# EAGLE board MD9600 Head (EAGLE 7.7.0)
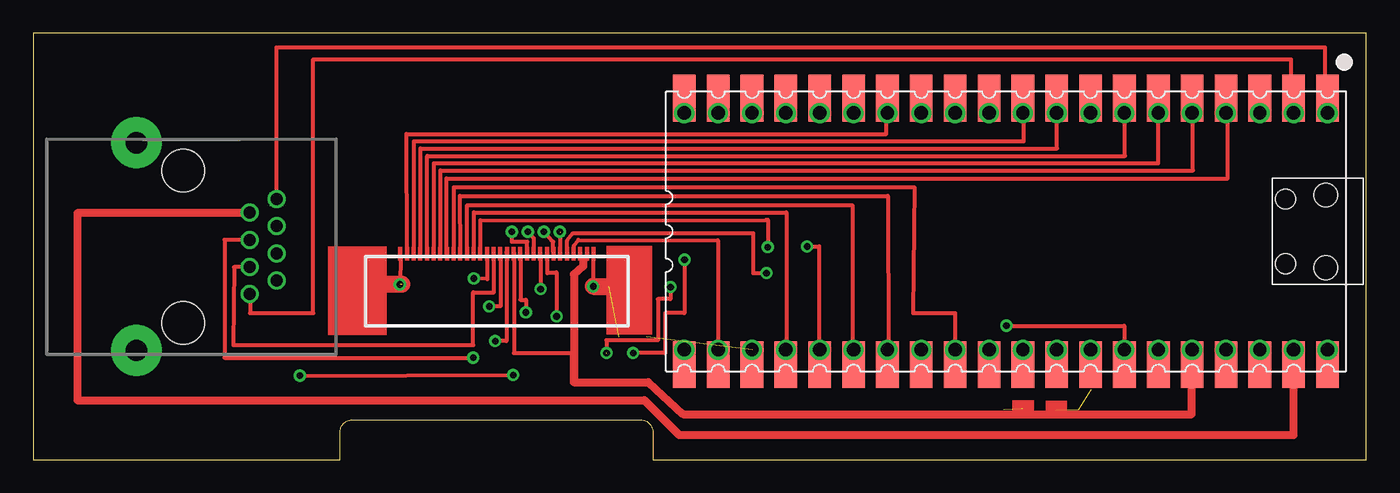
[diagram p0: board, top side]
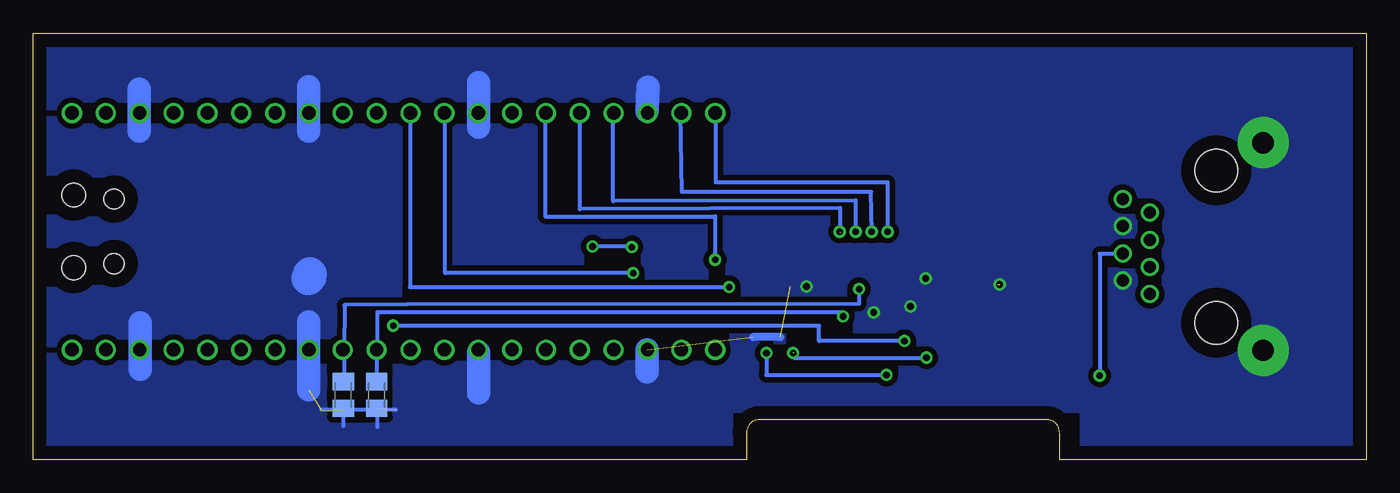
[diagram p1: board, bottom side, seen from below]

Size 100 x 32 mm. Coordinates in mm from the lower left corner, seen from the top.
Outline: 0,0 23,0 23,2 arc-90 24,3 45.5,3 arc-90 46.5,2 46.5,0 100,0 100,32 0,32 0,0
Copper layers (1*16): Top 0.035mm / dielectric 1.5mm / Bottom 0.035mm
Design rules "default": minimum track width 10mil, minimum drill 24mil, track to track 8mil, track to pad 8mil, pad to pad 8mil, via to via 8mil, smd to smd 8mil, copper to edge 40mil, drill to drill 8mil, minimum pad ring 10mil, minimum via ring 8mil, stop-mask expansion 4mil, vias tented up to drill 0mil, thermal gap 10mil
Holes 3.2 mm at 11.24,21.7 11.24,10.27

## Footprints (pad centres in the part's own frame; a part is rotated, then mirrored left to right if it is on the bottom)
PICO-PKG-NO_DEBUG = drill 1: 1 -7.62,25.4; 2 -7.62,22.86; 3 -7.62,20.32; 4 -7.62,17.78; 5 -7.62,15.24; 6 -7.62,12.7; 7 -7.62,10.16; 8 -7.62,7.62; 9 -7.62,5.08; 10 -7.62,2.54; 11 -7.62,0; 12 -7.62,-2.54; 13 -7.62,-5.08; 14 -7.62,-7.62; 15 -7.62,-10.16; 16 -7.62,-12.7; 17 -7.62,-15.24; 18 -7.62,-17.78; 19 -7.62,-20.32; 20 -7.62,-22.86; 21 10.16,-22.86; 22 10.16,-20.32; 23 10.16,-17.78; 24 10.16,-15.24; 25 10.16,-12.7; 26 10.16,-10.16; 27 10.16,-7.62; 28 10.16,-5.08; 29 10.16,-2.54; 30 10.16,0; 31 10.16,2.54; 32 10.16,5.08; 33 10.16,7.62; 34 10.16,10.16; 35 10.16,12.7; 36 10.16,15.24; 37 10.16,17.78; 38 10.16,20.32; 39 10.16,22.86; 40 10.16,25.4 | smd 3.5 x 1.7: P$1 -8.73,25.4; P$2 -8.73,22.86; P$3 -8.73,20.32; P$4 -8.73,17.78; P$5 -8.73,15.24; P$6 -8.73,12.7; P$7 -8.73,10.16; P$8 -8.73,7.62; P$9 -8.73,5.08; P$10 -8.73,2.54; P$11 -8.73,0; P$12 -8.73,-2.54; P$13 -8.73,-5.08; P$14 -8.73,-7.62; P$15 -8.73,-10.16; P$16 -8.73,-12.7; P$17 -8.73,-15.24; P$18 -8.73,-17.78; P$19 -8.73,-20.32; P$20 -8.73,-22.86; P$21 11.27,-22.86; P$22 11.27,-20.32; P$23 11.27,-17.78; P$24 11.27,-15.24; P$25 11.27,-12.7; P$26 11.27,-10.16; P$27 11.27,-7.62; P$28 11.27,-5.08; P$29 11.27,-2.54; P$30 11.27,0; P$31 11.27,2.54; P$32 11.27,5.08; P$33 11.27,7.62; P$34 11.27,10.16; P$35 11.27,12.7; P$36 11.27,15.24; P$37 11.27,17.78; P$38 11.27,20.32; P$39 11.27,22.86; P$40 11.27,25.4 | hole 1.8: -1.455,25.27; 3.995,25.27 | hole 1.5: -1.155,22.24; 3.695,22.24
C0805K = smd 1.3 x 1.6: 1 -1,0; 2 1,0

## Placement (x,y rotation side)
E$1  [PICO-PKG-NO_DEBUG]  71.7,18.4 270 top
E$2  [C0805K]  74.25,4.85 90 bottom
E$3  [C0805K]  76.75,4.85 90 bottom

## Library data of the parts
E$1 = RpiPico
E$2 E$3 = resistor

## Tracks (layer width: path | path; a pad name or v marks a point on that pad's centre or on a via)
GND  (via drill 0.5 pad 0.25, 0.9, 1.6 pad 3.81)  (6 unrouted)
  Top 0.305: 27.55,15.25 v27.5,13.15 | 34.05,15.2 34.05,13.55 v33.05,13.6 | 36.55,15.2 36.55,12 36.95,12 v36.95,11.05 | 42,15.25 v42,13 | 35.05,15.15 35.05,11.5 v34.2,11.5
  Top 1.27: v42,13 43.2,13 | 27.65,13.15 25.9,13.15
  Bottom 0.305: 72.8,3.75 78.4,3.75 | 74.2,3.8 74.2,2.45 | 76.75,3.7 76.75,2.5
  Bottom 0.6: 43.95,9.2 46,9.2
  Bottom 1.778: 92,10.28 92,6.78 | 92.05,24.68 92.05,27.8 | 79.35,24.65 79.35,28 | 66.6,24.95 66.6,28.3 | 53.95,26.15 53.9,27.95 | 66.6,8.05 66.6,5 | 79.35,10.35 79.35,5.25 | 53.95,8.25 53.95,6.6
  Bottom 2.54: 79.25,13.9 79.35,13.6
  other vias: 18.27,13.45 18.27,17.51 7.73,23.79 7.73,8.19
  pour Bottom (isolate 0.406): 1,1 1,31 99,31 99,1 48,1 48,4 21,4 21,1
S$1  (via drill 0.6)
  Top 0.305: v18.25,19.55 18.25,30.95 96.9,30.95 96.9,27.75 97,27.75
S$2
  Top 0.305: 16.25,12.4 16.25,11 21,11 21,30.05 94.35,30.05 94.35,28 94.6,28
S$3
  Top 0.305: 16.25,14.45 15.05,14.45 15,8.6 33,8.6 33,12.55 34.55,12.55 34.55,15.4
S$4  (via drill 0.5 pad 0.25)
  Top 0.305: v48.85,15 48.85,11 47.4,11 47.4,8 v45,8
  Bottom 0.305: 61.6,26 61.6,18.25 48.85,18.25 v48.85,15 | v45,8 45,6.35 36,6.35
S$5  (via drill 0.5 pad 0.25)
  Top 0.305: v20,6.3 36,6.35
  Bottom 0.305: 18.3,15.45 20,15.45 v20,6.3
S$6
  Bottom 0.305: 74.25,8.3 74.25,5.5
S$7
  Bottom 0.305: 76.7,8.25 76.7,5.45
S$9
  Top 0.305: 33.05,15.1 33.05,18.55 56.5,18.55 56.5,7.5
S$10  (via drill 0.5 pad 0.25)
  Top 0.305: 33.55,15.35 33.55,17.95 55,18 55.1,18 v55.1,15.95 | v58.05,16 58.95,16 58.95,8.15
  Bottom 0.305: v55.1,15.95 55.1,16 v58.05,16
S$11
  Top 0.305: 32.55,15.55 32.55,19.1 61.45,19.1 61.45,8.15 61.5,8.15
S$12
  Top 0.305: 32.05,15.6 32,19.8 64.1,19.8 64.15,8.2
S$13
  Top 0.305: 31.55,15.55 31.55,20.45 66.1,20.45 66,11 69.15,11 69.15,8.15 69.25,8.2
S$14
  Top 0.305: 40.55,15.4 40.55,16.05 40.9,16.5 51.35,16.45 51.35,8.25 51.3,8.25
S$15  (via drill 0.5 pad 0.25)
  Top 0.305: 40.05,15.5 40.05,16.45 40.5,17 54,17 54,14 v55,14
  Bottom 0.305: v55,14 69.1,14 69.1,26
S$16  (via drill 0.5 pad 0.25)
  Top 0.305: 38,15.15 38.05,15.15 v38.05,12.8
  Bottom 0.305: v38.05,12.8 38.05,11.7 71.95,11.65 76.65,11.6 76.7,8.15 76.85,8.15
S$17  (via drill 0.5 pad 0.25)
  Top 0.305: 38.55,15.25 38.55,14.05 | 38.55,14.05 38.55,14 | 38.55,14.05 39.25,14.05 v39.25,10.75
  Bottom 0.305: v39.25,10.75 39.25,11.05 74.2,11.05 74.2,8.15 74.25,8.15
S$18  (via drill 0.5 pad 0.25)
  Top 0.305: 37.05,15.55 37.05,16.35 35.9,16.35 v35.9,17.1
  Bottom 0.305: v35.9,17.1 35.9,20.8 48.8,20.8 48.8,26.05 48.85,26.05
S$19  (via drill 0.5 pad 0.25)
  Top 0.305: 37.55,15.55 37.55,16.6 v37.1,17.1
  Bottom 0.305: v37.1,17.1 37.15,20.1 51.35,20.1 51.45,26 51.4,26
S$20  (via drill 0.5 pad 0.25)
  Top 0.305: 39,15.6 39,16.35 v38.3,17.1
  Bottom 0.305: v38.3,17.1 38.3,19.45 56.5,19.4 56.5,25.95
S$22  (via drill 0.5 pad 0.25)  (1 unrouted)
  Top 0.305: 39.55,15.7 39.55,17 v39.5,17.1
  Bottom 0.305: 39.5,17.05 39.45,17.05 39.45,18.9 59,18.8 59,25.95
S$23
  Top 0.305: 31,15.45 31,21.1 89.6,21.1 89.6,26.05 89.65,26.05
S$24
  Top 0.305: 30.55,15.65 30.55,21.7 87,21.7 87,26.05 86.9,26.05
S$25
  Top 0.305: 30.05,15.55 30.05,22.25 84.4,22.25 84.4,26.1
S$26
  Top 0.305: 29.55,15.6 29.55,22.8 81.9,22.8 81.9,26
S$27
  Top 0.305: 29.05,15.55 29.05,23.35 76.8,23.35 76.8,26.05 76.85,26.05
S$28
  Top 0.305: 28.55,15.55 28.55,23.9 74.3,23.9 74.3,26.05
S$29
  Top 0.305: 28.05,15.5 28,24.45 64,24.45 64.05,26.05
S$30
  Top 0.61: 16.25,18.5 3.3,18.5 3.3,4.45 45.85,4.45 48.45,1.85 94.55,1.85 94.55,6.6
S$31  (via drill 0.5 pad 0.25)
  Top 0.305: 35.5,15.55 35.5,8.9 v34.65,8.9 | v73,10.05 81.85,10.05 81.85,8.15
  Bottom 0.305: v34.65,8.9 41.05,8.9 41.05,10.05 v73,10.05
S$33  (via drill 0.5 pad 0.25)
  other vias: 36,6.35
S$39  (via drill 0.9)
  other vias: 18.27,19.55
S$41  (via drill 0.9)
  other vias: 18.27,15.48
S$43  (via drill 0.9)
  other vias: 16.24,18.53
S$44  (via drill 0.9)
  other vias: 16.24,16.5
S$45  (via drill 0.9)
  other vias: 16.24,14.46
S$46  (via drill 0.9)
  other vias: 16.24,12.43
S$49  (via drill 0.5 pad 0.25)  (1 unrouted)
  Top 0.305: v47.8,12.95 47.8,12.05 46.85,12.05 46.85,8.95 43,8.95 v43,8 | 16.25,16.5 14.35,16.5 14.35,7.65 v33,7.65
  Bottom 0.305: 71.75,25.95 71.75,12.95 v47.8,12.95 | 42.95,8 42.95,7.65 v33,7.65
VCC
  Top 0.305: 41.5,15 41.25,15 | 36.05,15.55 36.05,8 40.45,8 40.7,8
  Top 0.406: 40.55,5.8 40.45,5.8 40.45,8
  Top 0.61: 86.85,6.85 86.9,6.85 86.9,3.4 48.75,3.4 46.15,5.8 40.55,5.8 40.55,13.9 41.25,14.5 41.25,15
(copper drawn outside any net)
  shapes: Top area x34

## Text on the board
Document: OpenMD9600 Remote | G4EML | HEAD | RADIO